# EAGLE board Traffic-light_TinkerCAD_volFinal (EAGLE 9.7.0)

Size 118.49 x 208.6 mm. Coordinates in mm from the lower left corner, seen from the top.
Outline: 0,0 118.49,0 118.49,208.6 0,208.6 0,0
Copper layers (1*16): Top 0.035mm / dielectric 1.5mm / Bottom 0.035mm
Design rules "default": minimum track width 6mil, minimum drill 0.35mm, track to track 6mil, track to pad 6mil, pad to pad 6mil, via to via 6mil, smd to smd 6mil, copper to edge 40mil, drill to drill 6mil, minimum pad ring 10mil, minimum via ring 8mil, stop-mask expansion 4mil, vias tented up to drill 0mil, thermal gap 10mil

## Footprints (pad centres in the part's own frame; a part is rotated, then mirrored left to right if it is on the bottom)
LEDRD254W60D565H860B = drill 0.981 pad 1.581: 1 -1.27,0; 2 1.27,0
LEDRD254W60D565H860B_Y = drill 0.981 pad 1.581: 1 -1.27,0; 2 1.27,0
LEDRD254W60D565H860B_G = drill 0.981 pad 1.581: 1 -1.27,0; 2 1.27,0
RESAD1016W63L850D250B = drill 0.83 pad 1.43: 1 -5.08,0; 2 5.08,0
SWITCH-MOMENTARY-PTH-6.5MM = drill 1.016 pad 1.88: 1 -3.251,2.261; 2 3.251,2.261; 3 -3.251,-2.261; 4 3.251,-2.261
ARDUINO-UNO-R3-SHIELD = drill 1.016 pad 1.88: 3.3V 24.13,-2.54; 5V 24.13,0; A0 24.13,12.7; A1 24.13,15.24; A2 24.13,17.78; A3 24.13,20.32; A4 24.13,22.86; A5 24.13,25.4; AREF -24.13,-13.97; D2 -24.13,20.32; D3 -24.13,17.78; D4 -24.13,15.24; D5 -24.13,12.7; D6 -24.13,10.16; D7 -24.13,7.62; D8 -24.13,3.81; D9 -24.13,1.27; D10 -24.13,-1.27; D11 -24.13,-3.81; D12 -24.13,-6.35; D13 -24.13,-8.89; GND@0 24.13,2.54; GND@1 24.13,5.08; GND@2 -24.13,-11.43; IOREF 24.13,-7.62; NC 24.13,-10.16; RES 24.13,-5.08; RX -24.13,25.4; SCL -24.13,-19.05; SDA -24.13,-16.51; TX -24.13,22.86; VIN 24.13,7.62

## Placement (x,y rotation side)
D1  RED  [LEDRD254W60D565H860B]  107.32,163.28 90 top
D2  YELLOW  [LEDRD254W60D565H860B_Y]  107.32,155.66 90 top
D3  GREEN  [LEDRD254W60D565H860B_G]  107.32,148.04 90 top
D4  RED  [LEDRD254W60D565H860B]  107.32,137.88 90 top
D5  GREEN  [LEDRD254W60D565H860B_G]  107.32,132.8 90 top
D6  GREEN  [LEDRD254W60D565H860B_G]  107.26,6.06 90 top
D7  RED  [LEDRD254W60D565H860B]  107.26,11.14 90 top
D8  GREEN  [LEDRD254W60D565H860B_G]  107.26,21.3 90 top
D9  YELLOW  [LEDRD254W60D565H860B_Y]  107.26,28.92 90 top
D10  RED  [LEDRD254W60D565H860B]  107.26,36.54 90 top
R1  150  [RESAD1016W63L850D250B]  94.62,149.31 0 top
R2  150  [RESAD1016W63L850D250B]  94.62,156.93 0 top
R3  150  [RESAD1016W63L850D250B]  94.62,164.55 0 top
R4  150  [RESAD1016W63L850D250B]  94.62,134.07 0 top
R5  150  [RESAD1016W63L850D250B]  94.62,139.15 0 top
R6  1k  [RESAD1016W63L850D250B]  94.62,184.87 0 top
R7  1k  [RESAD1016W63L850D250B]  94.56,58.13 0 top
R8  150  [RESAD1016W63L850D250B]  94.56,7.33 0 top
R9  150  [RESAD1016W63L850D250B]  94.56,12.41 0 top
R10  150  [RESAD1016W63L850D250B]  94.56,22.57 0 top
R11  150  [RESAD1016W63L850D250B]  94.56,30.19 0 top
R12  150  [RESAD1016W63L850D250B]  94.56,37.81 0 top
S1  SWITCH_MOMENTARY  [SWITCH-MOMENTARY-PTH-6.5MM]  111.13,182.33 0 top
S2  SWITCH_MOMENTARY  [SWITCH-MOMENTARY-PTH-6.5MM]  111.07,55.59 0 top
U1  ARDUINO-UNO-R3-SHIELD  [ARDUINO-UNO-R3-SHIELD]  31.49,160.71 180 top
U2  ARDUINO-UNO-R3-SHIELD  [ARDUINO-UNO-R3-SHIELD]  29.84,36.01 180 top

## Library data of the parts
D1 D4 D7 D10 = Tinkercad; CATEGORY: Opto-Electronic; SUB-CATEGORY: LED; VALUE: LED_RED
D2 D9 = Tinkercad; CATEGORY: Opto-Electronic; SUB-CATEGORY: LED; VALUE: LED_YELLOW
D3 D5 D6 D8 = Tinkercad; CATEGORY: Opto-Electronic; SUB-CATEGORY: LED; VALUE: LED_GREEN
R1-R12 S1 S2 U1 U2 = Tinkercad

## Nets
D1_C: D1.2 R3.2
D2_C: D2.2 R2.2
D3_C: D3.2 R1.2
D4_C: D4.2 R5.2
D5_C: D5.2 R4.2
D6_C: D6.2 R8.2
D7_C: D7.2 R9.2
D8_C: D8.2 R10.2
D9_C: D9.2 R11.2
D10_C: D10.2 R12.2
U1_5V: S1.3 S1.4 U1.5V
U1_A4: U1.A4 U2.A4
U1_D2: R6.2 S1.1 S1.2 U1.D2
U1_D9: D5.1 U1.D9
U1_D10: D4.1 U1.D10
U1_D11: D3.1 U1.D11
U1_D12: D2.1 U1.D12
U1_D13: D1.1 U1.D13
U1_GND: R1.1 R2.1 R3.1 R4.1 R5.1 R6.1 R7.1 R8.1 R9.1 R10.1 R11.1 R12.1 U1.GND@0 U1.GND@1 U1.GND@2 U2.GND@0 U2.GND@1 U2.GND@2
U2_5V: S2.3 S2.4 U2.5V
U2_A5: U1.A5 U2.A5
U2_D2: R7.2 S2.1 S2.2 U2.D2
U2_D9: D6.1 U2.D9
U2_D10: D7.1 U2.D10
U2_D11: D8.1 U2.D11
U2_D12: D9.1 U2.D12
U2_D13: D10.1 U2.D13

## Tracks (layer width: path | path; a pad name or v marks a point on that pad's centre or on a via)
D1_C  (1 unrouted)
D2_C  (1 unrouted)
D3_C  (1 unrouted)
D4_C  (1 unrouted)
D5_C  (1 unrouted)
D6_C  (1 unrouted)
D7_C  (1 unrouted)
D8_C  (1 unrouted)
D9_C  (1 unrouted)
D10_C  (1 unrouted)
U1_5V  (2 unrouted)
U1_A4  (1 unrouted)
U1_D2  (3 unrouted)
U1_D9  (1 unrouted)
U1_D10  (1 unrouted)
U1_D11  (1 unrouted)
U1_D12  (1 unrouted)
U1_D13  (1 unrouted)
U1_GND  (17 unrouted)
U2_5V  (2 unrouted)
U2_A5  (1 unrouted)
U2_D2  (3 unrouted)
U2_D9  (1 unrouted)
U2_D10  (1 unrouted)
U2_D11  (1 unrouted)
U2_D12  (1 unrouted)
U2_D13  (1 unrouted)